# Altium PCB ch347-hs-usb-bridge.PcbDoc
Units mm, origin at the board's own origin, x right, y up, seen from the top; angles counter-clockwise.
Board outline 40 x 26 mm, 2 copper layers (Top Layer, Bottom Layer); 28 components, 29 nets, 116 pads, 130 vias.
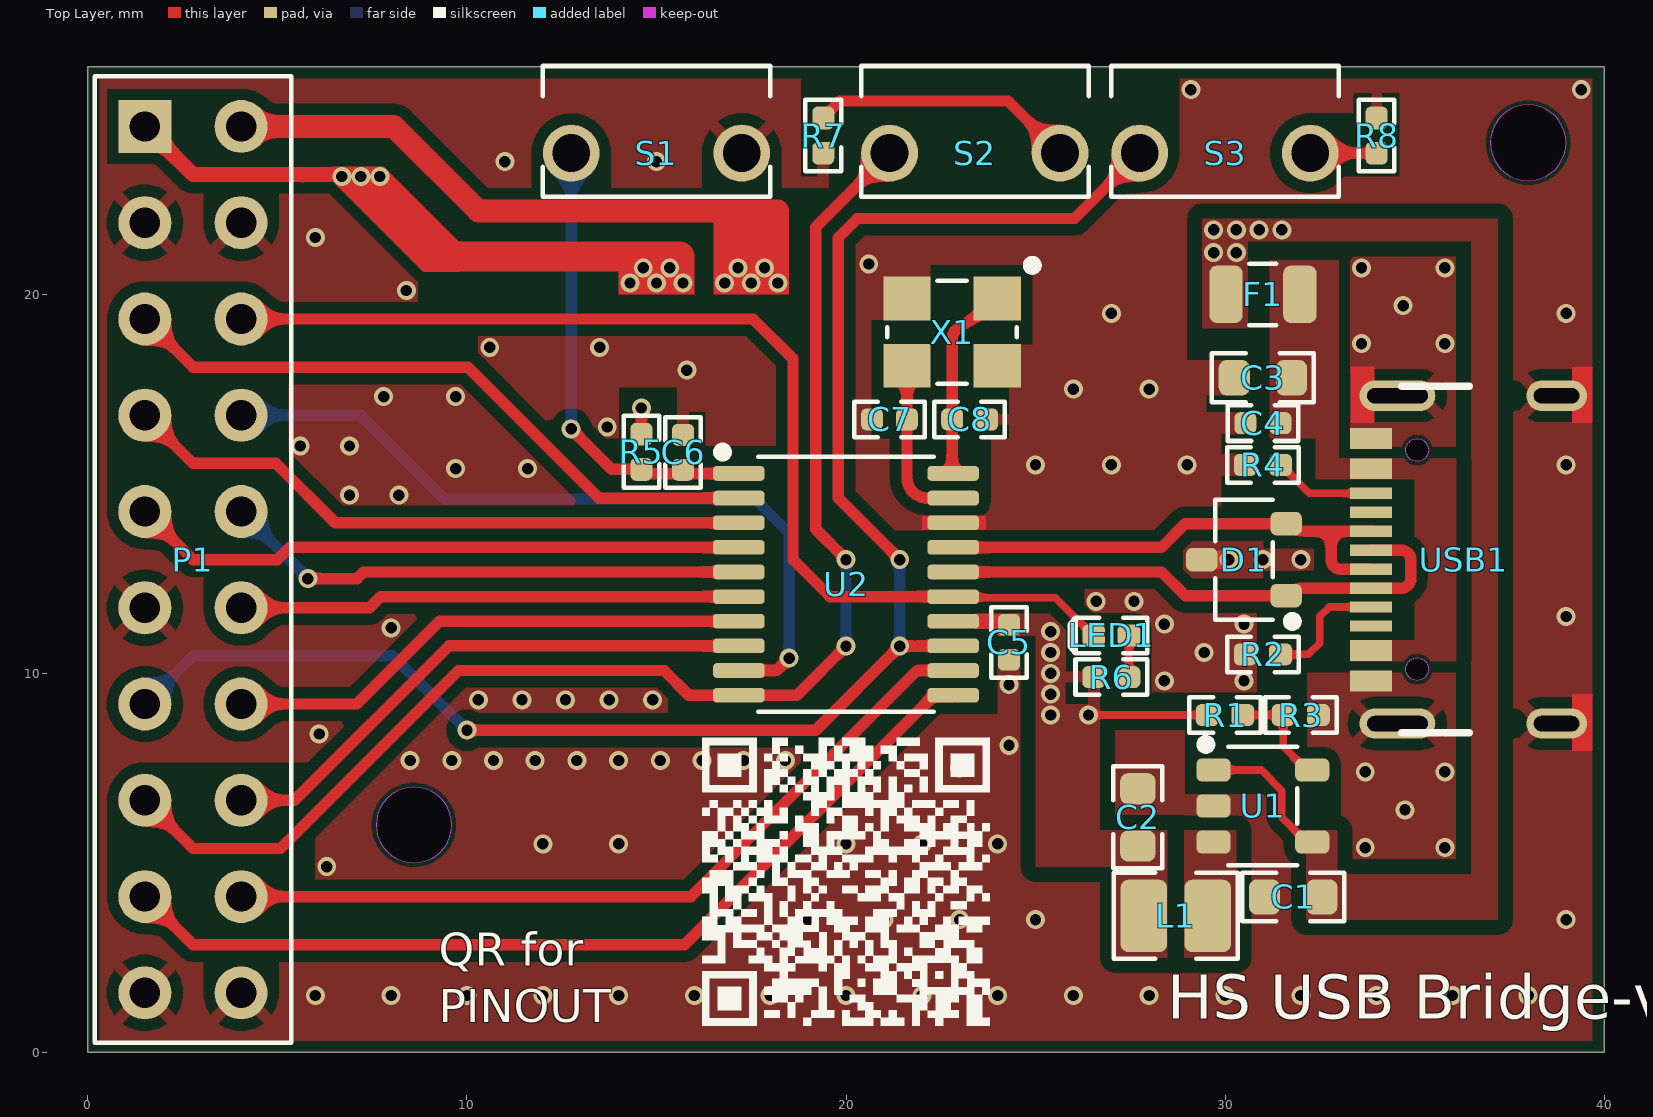
[diagram p0: Top Layer view]
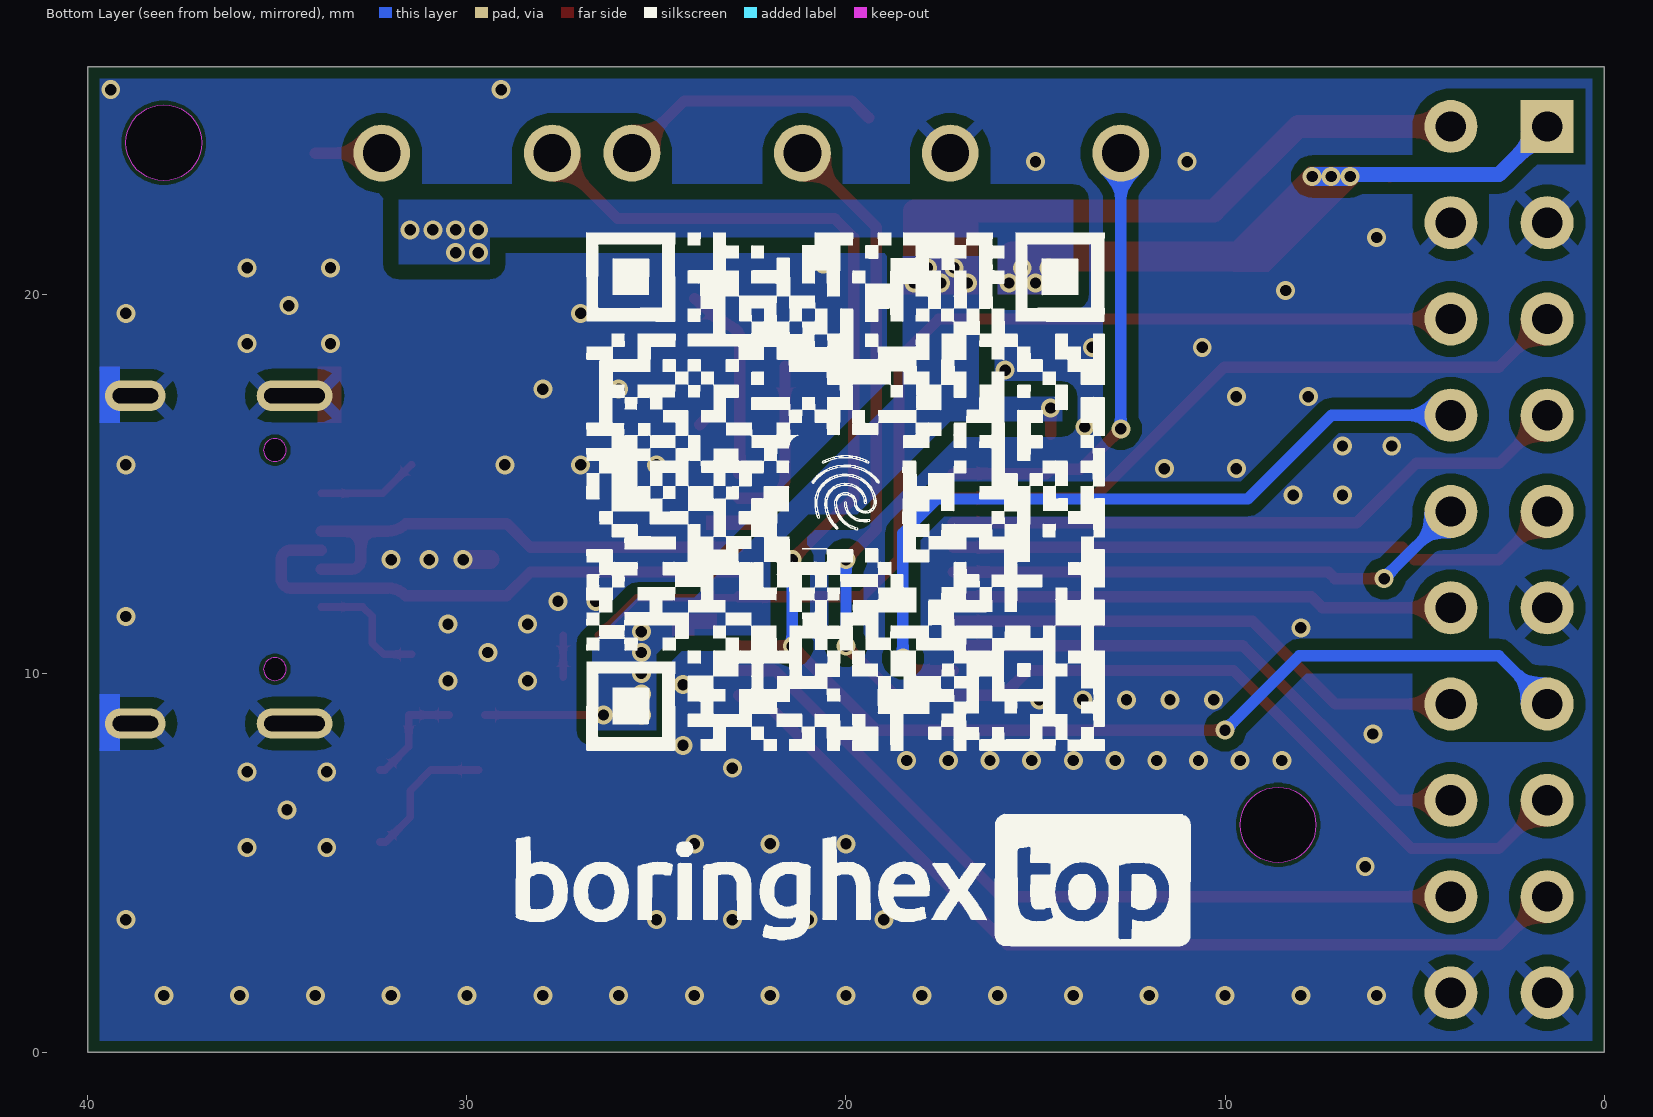
[diagram p1: Bottom Layer view, seen from below]
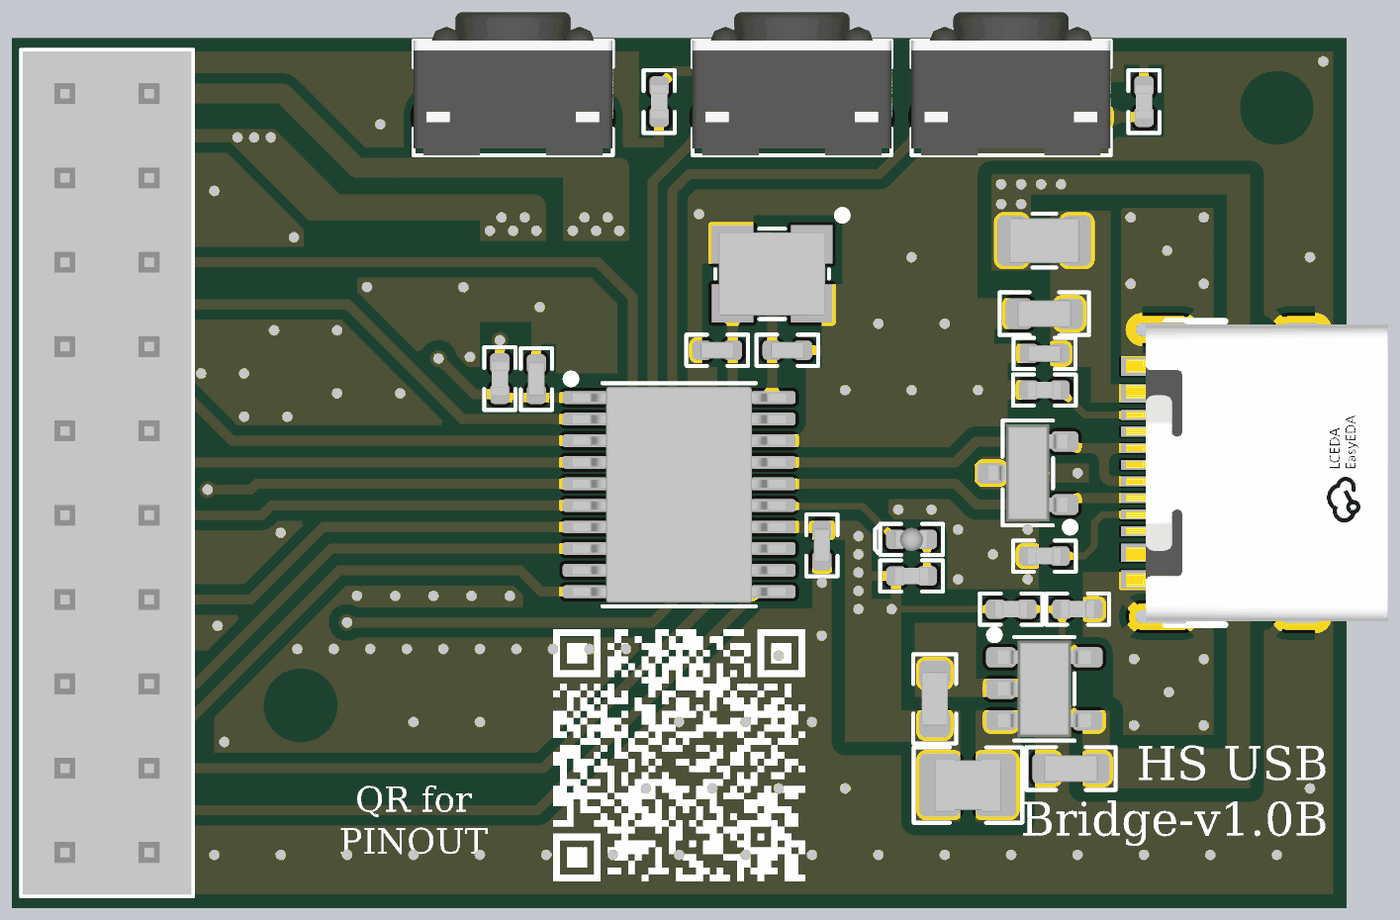
[diagram p2: 3D render of the assembled board from above, using the file's embedded part models]

## Layer stack, top to bottom
Top Solder: solder mask 0.0102, Solder Resist, Dk 3.5
Top Layer: signal copper 0.0356
Dielectric 1: dielectric 0.32, FR-4, Dk 4.8
Bottom Layer: signal copper 0.0356
Bottom Solder: solder mask 0.0102, Solder Resist, Dk 3.5

## Board outline
0,0 0,26 40,26 40,0
cut-out: 37,24 ccw(c38,24) 38,23 ccw(c38,24) 39,24 ccw(c38,24) 38,25 ccw(c38,24)
cut-out: 7.6,6 ccw(c8.6,6) 8.6,5 ccw(c8.6,6) 9.6,6 ccw(c8.6,6) 8.6,7 ccw(c8.6,6)

## Design rules (kind name [scope] priority, off if disabled: settings)
BoardOutlineClearance [All] p1: gap=0.3 ignorepadtopadclearanceinfootprint=FALSE except(0.1: Poly-CutoutEdge)
Clearance Clearance_2 [InNet('USB5V') vs InNet('NetR4_2') or InNet('GND') or InNet('B8') or InComponent('USB1')] p1: gap=0.3 ignorepadtopadclearanceinfootprint=TRUE except(0.1: Poly-Region; 0.225: SMDPad-Poly; 0.25: Track-Poly)
Clearance Clearance_1 [OnTopLayer or OnBottomLayer vs OnTopLayer or OnBottomLayer] p2: gap=0.3 ignorepadtopadclearanceinfootprint=TRUE except(0.4: Poly-Poly)
Clearance [All] p3: gap=0.3 ignorepadtopadclearanceinfootprint=TRUE except(0.1: Poly-Region; 0.5: Poly-Poly)
DiffPairsRouting [All] p1: maxlimit=0.3 minlimit=0.1 mostfreqgap=0.15 toplayer_minwidth=0.1 toplayer_maxwidth=0.3 toplayer_prefwidth=0.15 bottomlayer_minwidth=0.1 bottomlayer_maxwidth=0.3 bottomlayer_prefwidth=0.15 maxuncoupledlength=5
PolygonConnect PolygonConnect_1 [not InNet('GND')] p1: connectstyle=Direct reliefconductorwidth=0.254 reliefentries=4 polygonreliefangle="90 Angle" airgapwidth=0.254
PolygonConnect [All] p2: thpad.connectstyle=Relief thpad.reliefconductorwidth=0.3 thpad.reliefentries=4 thpad.polygonreliefangle="45 Angle" thpad.airgapwidth=0.3 smdpad.connectstyle=Direct smdpad.reliefconductorwidth=0.3 smdpad.reliefentries=4 smdpad.polygonreliefangle="90 Angle" smdpad.airgapwidth=0.3 via.connectstyle=Direct via.reliefconductorwidth=0.254 via.reliefentries=4 via.polygonreliefangle="90 Angle" via.airgapwidth=0.254
RoutingVias [All] p1: holewidth=0.3 width=0.5 viastyle="Through Hole" minholewidth=0.25 minwidth=0.4 maxholewidth=0.8 maxwidth=1
SolderMaskExpansion [All] p1: expansion=0.102 istentingtop=FALSE
Width [All] p1: maxlimit=1 minlimit=0.1 preferedwidth=0.3
29 further rules are at their usual default settings.

## Classes and differential pairs
differential pair UD: +UD_P -UD_N

## Components (designator, comment, footprint, x,y, rotation, side; value= is the part's Value field where it differs from the comment)
C1 "Capacitor" CAPC160X80X90L30N 31.8,4.1 r0 top value=10u
C2 "Capacitor" CAPC160X80X90L30N 27.7,6.2 r270 top value=10u
C3 "Capacitor" CAPC160X80X90L30N 31,17.8 r0 top value=10u
C4 "Capacitor" CAPC100X50X55L25N 31,16.6 r0 top value=100n
C5 "Capacitor" CAPC100X50X55L25N 24.3,10.818 r90 top value=100n
C6 "Capacitor" CAPC100X50X55L25N 15.7,15.83 r270 top value=100n
C7 "Capacitor" CAPC100X50X55L25N 21.148,16.7 r180 top value=10p
C8 "Capacitor" CAPC100X50X55L25N 23.262,16.7 r180 top value=10p
D1 "PESD3V3L2BT-ES" SOT23-3P95_237X111L52X43N 30.5,13 r90 top
F1 "SMD0805B050TF" FUSC210X135X125L37N 31,20 r180 top
L1 "Inductor" INDC200X160X105L60N 28.7,3.6 r180 top value=2u2
LED1 "蓝灯 正贴" LEDC100X50X45L25N 27,11 r0 top
P1 "Header 10X2" HDRV20W63P254_10X2_2540X508H860 1.5,24.43 r270 top
R1 "Resistor" RESC100X50X35L25N 30,8.9 r180 top value=100k
R2 "Resistor" RESC100X50X35L25N 31,10.5 r180 top value=4k7
R3 "Resistor" RESC100X50X35L25N 32,8.9 r180 top value=22k1
R4 "Resistor" RESC100X50X35L25N 31,15.5 r0 top value=4k7
R5 "Resistor" RESC100X50X35L25N 14.6,15.846 r270 top value=4k7
R6 "Resistor" RESC100X50X35L25N 27,9.9 r0 top value=470
R7 "Resistor" RESC100X50X35L25N 19.4,24.19 r270 top value=4k7
R8 "Resistor" RESC100X50X35L25N 34,24.19 r90 top value=4k7
S1 "KEY" RESRR450W70L600T345H610 15,23.725 r0 top
S2 "KEY" RESRR450W70L600T345H610 23.4,23.725 r0 top
S3 "KEY" RESRR450W70L600T345H610 30,23.725 r0 top
U1 "M3406-ADJ" SOT23-5P95_280X110L37X40N 31,6.5 r270 top
U2 "CH347" SOP20P65_650X640X120L60X24N 20,12.349 r270 top
USB1 "USB-TYPE-C-018" USB-TYPE-C-018 36.3,13 r90 top
X1 "TAXM8M4RDBCCT2T" OSCCC320X250X80L90X100N 22.8,19 r180 top

## Footprints (in the part's own frame and the unit in brackets; to place one, negate y for a bottom-side part, rotate by r counter-clockwise, add the part's x,y. Pads: shape width x height; smd on the part's side, far side on the other; paste and mask are expansions set on the pad)
CAPC100X50X55L25N [mm] "Capacitor, Chip; 1.00 mm L X 0.50 mm W X 0.55 mm H body"
  rrect50% 0.575x0.58 smd: 1(-0.462,0) 2(0.462,0)
  silkscreen extent -0.93,-0.47 0.93,0.47, body extent -0.5,-0.25 0.5,0.25, height 0.55
CAPC160X80X90L30N [mm] "Capacitor, Chip; 1.60 mm L X 0.80 mm W X 0.90 mm H body"
  rrect49% 0.82x0.929 smd: 1(-0.755,0) 2(0.755,0)
  silkscreen extent -1.35,-0.64 1.35,0.64, body extent -0.8,-0.4 0.8,0.4, height 0.9
FUSC210X135X125L37N [mm] "Fuse, Chip; 2.10 mm L X 1.35 mm W X 1.25 mm H body"
  rrect46% 0.879x1.52 smd: 1(-0.975,0) 2(0.975,0)
  silkscreen extent -0.36,-0.81 0.36,0.81, body extent -1.05,-0.67 1.05,0.67, height 1.25
HDRV20W63P254_10X2_2540X508H860 [mm] "Header, Vertical Non-Shrouded, 2.54 mm pitch; 0.68 mm lead width, 20 pin, 2 rows, 25.40 mm L X 5.08 mm W X 8.70 mm H body"
  rect 1.4x1.4 hole 0.8 paste-1.65: 1(0,0)
  round 1.4 hole 0.8 paste-1.65: 2(0,2.54) 3(2.54,0) 4(2.54,2.54) 5(5.08,0) 6(5.08,2.54) 7(7.62,0) 8(7.62,2.54) 9(10.16,0) 10(10.16,2.54) 11(12.7,0) 12(12.7,2.54) 13(15.24,0) 14(15.24,2.54) 15(17.78,0) 16(17.78,2.54) 17(20.32,0) 18(20.32,2.54) 19(22.86,0) 20(22.86,2.54)
  silkscreen extent -1.32,-1.32 24.18,3.86, body extent -1.27,-1.27 24.13,3.81, height 8.7
INDC200X160X105L60N [mm] "Inductor, Chip; 2.00 mm L X 1.60 mm W X 1.05 mm H body"
  rrect33% 1.226x1.91 smd: 1(-0.842,0) 2(0.842,0)
  silkscreen extent -1.64,-1.13 1.64,1.13, body extent -1,-0.8 1,0.8, height 1.05
LEDC100X50X45L25N [mm] "LED, Chip; 1.00 mm L X 0.50 mm W X 0.45 mm H body"
  rrect50% 0.6x0.58 smd: A(0.465,0) C(-0.465,0)
  silkscreen extent -1.1,-0.47 0.94,0.47, body extent -0.5,-0.35 0.5,0.35, height 0.8
OSCCC320X250X80L90X100N [mm] "Oscillator, Corner Concave; 3.20 mm L X 2.50 mm W X 0.80 mm H body"
  rect 1.249x1.149 smd: 1(-1.19,-0.89) 2(1.19,-0.89) 3(1.19,0.89) 4(-1.19,0.89)
  silkscreen extent -2.24,-1.89 1.71,1.36, body extent -1.6,-1.25 1.6,1.25, height 0.85
RESC100X50X35L25N [mm] "Resistor, Chip; 1.00 mm L X 0.50 mm W X 0.35 mm H body"
  rrect50% 0.6x0.58 smd: 1(-0.465,0) 2(0.465,0)
  silkscreen extent -0.94,-0.47 0.94,0.47, body extent -0.5,-0.25 0.5,0.25, height 0.35
RESRR450W70L600T345H610 [mm] "Resistor, Radial (Molded); 4.50 mm pitch X 0.70 mm W X 6.00 mm L X 3.45 mm T X 6.10 mm H body"
  round 1.5 hole 1 paste-1.5: 1(-2.25,0) 2(2.25,0)
  silkscreen extent -3,-1.15 3,2.3, body extent -3,-1.15 3.01,3.15, height 6.01
SOP20P65_650X640X120L60X24N [mm] "Small Outline Pkg (SOP), 0.65 mm pitch; 20 pin, 6.50 mm L X 4.40 mm W X 1.20 mm H body"
  rrect50% 0.387x1.359 smd: 1(-2.925,-2.828) 2(-2.275,-2.828) 3(-1.625,-2.828) 4(-0.975,-2.828) 5(-0.325,-2.828) 6(0.325,-2.828) 7(0.975,-2.828) 8(1.625,-2.828) 9(2.275,-2.828) 10(2.925,-2.828) 11(2.925,2.828) 12(2.275,2.828) 13(1.625,2.828) 14(0.975,2.828) 15(0.325,2.828) 16(-0.325,2.828) 17(-0.975,2.828) 18(-1.625,2.828) 19(-2.275,2.828) 20(-2.925,2.828)
  silkscreen extent -3.61,-3.38 3.36,2.31, body extent -3.25,-3.2 3.25,3.2, height 1.2
SOT23-3P95_237X111L52X43N [mm] "Small Outline Transistor, SOT-23 Type, 0.95 mm pitch; 3 pin, 2.92 mm L X 1.30 mm W X 1.11 mm H body"
  rrect50% 0.621x0.826 smd: 1(-0.95,-1.113) 2(0.95,-1.113) 3(0,1.113)
  silkscreen extent -1.75,-1.4 1.58,0.76, body extent -1.46,-1.18 1.46,1.18, height 1.11
SOT23-5P95_280X110L37X40N [mm] "Small Outline Transistor, SOT-23 Type, 0.95 mm pitch; 5 pin, 2.90 mm L X 1.60 mm W X 1.10 mm H body"
  rrect50% 0.609x0.905 smd: 1(-0.95,-1.303) 2(0,-1.303) 3(0.95,-1.303) 4(0.95,1.303) 5(-0.95,1.303)
  silkscreen extent -1.75,-1.63 1.56,0.91, body extent -1.45,-1.4 1.45,1.4, height 1.1
USB-TYPE-C-018 [mm]
  rect 0.3x1.1 smd mask+0.05: A1(-3.325,2.45) A4(-2.525,2.45) A5(-1.25,2.45) A6(-0.25,2.45) A7(0.25,2.45) A8(1.25,2.45) A9(2.525,2.45) A12(3.325,2.45) B1(3.075,2.45) B4(2.275,2.45) B5(1.75,2.45) B6(0.75,2.45) B7(-0.75,2.45) B8(-1.75,2.45) B9(-2.275,2.45) B12(-3.075,2.45)
  oval 0.8x1.6 hole 0.4 slot 1.2 at 90 deg: SH1(-4.325,-2.45) SH2(4.325,-2.45)
  oval 0.8x2 hole 0.4 slot 1.6 at 90 deg: SH3(4.325,1.75) SH4(-4.325,1.75)
  Keep-Out Layer board cut-out: 2.89,0.93 2.775,0.953 2.678,1.018 2.613,1.115 2.59,1.23 2.59,1.23 2.613,1.345 2.678,1.442 2.775,1.507 2.89,1.53 2.89,1.53 3.005,1.507 3.102,1.442 3.167,1.345 3.19,1.23 3.19,1.23 3.167,1.115 3.102,1.018 3.005,0.953 2.89,0.93
  Keep-Out Layer board cut-out: -2.89,0.93 -3.005,0.953 -3.102,1.018 -3.167,1.115 -3.19,1.23 -3.19,1.23 -3.167,1.345 -3.102,1.442 -3.005,1.507 -2.89,1.53 -2.89,1.53 -2.775,1.507 -2.678,1.442 -2.613,1.345 -2.59,1.23 -2.59,1.23 -2.613,1.115 -2.678,1.018 -2.775,0.953 -2.89,0.93
  silkscreen extent -4.57,-0.14 4.57,1.64, body extent -4.47,-5.05 4.47,2.85, height 3.25

## Part data
C1 C2 C3: library part GRM188R61E106KA73D, Case/Package=0603, Manufacturer=CCTC(三环), MPN=TCC0603X5R106K100CT, Mounting Type=SMD, 编号=C380314
C4 C5 C6: library part GRM188R61E106KA73D, Case/Package=0402, Manufacturer=CCTC(三环), MPN=TCC0402X5R104M250AT, Mounting Type=SMD, 编号=C359190
C7 C8: library part GRM188R61E106KA73D, Case/Package=0402, Manufacturer=YAGEO(国巨), MPN=CC0402JRNPO9BN100, Mounting Type=SMD, 编号=C106199
D1: library part SMC24, "2路双向ESD", Manufacturer=ElecSuper(静芯微), 编号=C5180242
F1: library part "Fuse 1", "Fuse", 编号=C269104
L1: library part WPN201610U2R2MTY01, Case/Package=201610, Manufacturer=DDY(德立), MPN=SFE201610-2R2M, Mounting Type=SMD, 编号=C5159659
LED1: library part LED-SMD, "贴片LED", 编号=C965795
P1: "Header, 10-Pin, Dual row", 编号=C5116480
R1: library part RC0402FR-07100KL, Case/Package=0402, Manufacturer=RALEC(旺诠), MPN=RTT021003FTH, Mounting Type=SMD, 编号=C102750
R2 R4 R5 R7 R8: library part RC0402FR-07100KL, Case/Package=0402, Manufacturer=RALEC(旺诠), MPN=RTT02472JTH, Mounting Type=SMD, 编号=C103059
R3: library part RC0402FR-0722K1L, Case/Package=0402, Manufacturer=RALEC(旺诠), MPN=RTT022212FTH, Mounting Type=SMD, 编号=C102896
R6: library part RC0402FR-07100KL, Case/Package=0402, Manufacturer=RALEC(旺诠), MPN=RTT02471JTH, Mounting Type=SMD, 编号=C103058
S1 S2 S3: library part SW-PB, "Switch", Revision="July-2002: Re-released for DXP Platform.", 编号=C2888565
U1: "Vin=2V~6V,800mA,DCDC", Manufacturer=西安航天民芯, Mounting Type=SMD, MPN=M3406-ADJ, 编号=C83224
X1: library part X32258MSB4SI, "8MHz ±10ppm 10pF", Manufacturer=TAE(雅晶鑫), 编号=C400090
U2: 编号=C5122332
USB1: 编号=C2927038

## Via types
v1: diameter 0.5, hole 0.3, Top Layer to Bottom Layer, tented both sides, 130 vias

## Nets (pads, with @x,y where several pads share a name; then routed paths per layer and width w, separated by ;. In a path a pad name is that pad's centre, name@x,y a point inside that pad or via, vN(x,y) a via of type N, cw(c..) or ccw(c..) an arc to the next point about the centre after c; other vN are vias at no path point)
3V3: C2.2 C5.2 L1.2 P1.2 R1.2 R5.1 R6.1 U2.14 | length 18.7
  Top Layer w0.2: v1@26.6,8.9 R1.2
  Top Layer w0.3: R5.1 v1(14.6,17)
  Top Layer w0.6: P1.2 8.07,24.43 10.3,22.2 18.2,22.2
  other v1: 25.4,8.9 26.4,8.9 25.4,9.45 25.4,10 25.4,10.55 25.4,11.1 16.8,20.3 17.5,20.3 18.2,20.3 17.15,20.7 17.85,20.7
5V: C1.2 F1.2 P1.1 U1.1 U1.4 | length 23.2
  Top Layer w0.2: U1.1 30.95,7.45 31.5,6.9 31.5,6.2 32.15,5.55 U1.4
  Top Layer w0.4: P1.1 2.77,23.16 v1@6.5,23.16 ; 5.65,23.16 5.654,23.156 ; v1@6.691,23.156 6.7,23.147 v1(6.7,23.11) v1(7.2,23.11) v1(7.7,23.11)
  Top Layer w0.8: 9.5,21 15.35,21 15.6,21
  Bottom Layer w0.4: P1.1 2.77,23.16 v1@7.7,23.16
  other v1: 14.3,20.3 15,20.3 15.7,20.3 14.65,20.7 15.35,20.7 29.7,21.1 30.3,21.1 29.7,21.7 30.3,21.7 30.9,21.7 31.5,21.7
CTS0: P1.12 U2.6 | length 13.3
  Top Layer w0.3: P1.12 7.43,11.73 7.724,12.024 U2.6
CTS1: P1.5 U2.2 | length 17.6
  Top Layer w0.3: P1.5 2.77,18.08 10.02,18.08 13.476,14.624 U2.2
DCD0: LED1.C P1.6 U2.15 | length 29.1
  Top Layer w0.2: U2.15 22.853,12 25.525,12 26.525,11 LED1.C
  Top Layer w0.3: P1.6 17.55,19.35 18.6,18.3 18.6,13 19.576,12.024 U2.15
DSR0: P1.10 U2.5 | length 13.9
  Top Layer w0.3: v1(5.8,12.5) 7.1,12.5 7.274,12.674 U2.5
  Bottom Layer w0.3: P1.10 v1@5.81,12.5
DTR0: P1.8 U2.9 | length 20.7
  Top Layer w0.3: U2.9 18.175,10.074 v1(18.5,10.4)
  Bottom Layer w0.3: P1.8@3.84,16.81 7.19,16.81 9.4,14.6 17.6,14.6 18.5,13.7 v1(18.5,10.4)
DTR1: P1.15 S2.1 U2.10 | length 35.9
  Top Layer w0.3: P1.15 2.77,5.38 5.08,5.38 9.774,10.074 15.2,10.074 15.85,9.424 18.707,9.424 v1(20,10.718) ; v1(20,13) 19.2,13.8 19.2,21.775 S2.1
  Bottom Layer w0.3: v1(20,10.718) v1(20,13)
GND: C1.1 C2.1 C3.1 C4.1 C5.1 C6.1 C7.2 C8.1 D1.3 P1.3 P1.4 P1.11 P1.19 P1.20 R2.2 R3.1 R4.1 R7.2 R8.2 S1.2 U1.2 U2.18 USB1.A1 USB1.A12 USB1.B1 USB1.B12 USB1.SH1 USB1.SH2 USB1.SH3 USB1.SH4 X1.2 X1.4 | length 0.9
  Top Layer w0.3: C8.1 C8.1@23.862,16.56
  Top Layer w0.5: D1.3 v1(30.1,13)
  other v1: 6,1.5 8,1.5 10,1.5 12,1.5 14,1.5 16,1.5 18,1.5 20,1.5 22,1.5 24,1.5 26,1.5 28,1.5 30,1.5 32,1.5 34,1.5 36,1.5 38,1.5 19,3.5 21,3.5 23,3.5 25,3.5 39,3.5 6.3,4.9 33.7,5.4 35.8,5.4 12,5.5 14,5.5 20,5.5 22,5.5 24,5.5 34.75,6.4 33.7,7.4 35.8,7.4 23,7.5 8.5,7.7 9.6,7.7 10.7,7.7 11.8,7.7 12.9,7.7 14,7.7 15.1,7.7 16.2,7.7 17.3,7.7 18.4,7.7 24.3,8.1 6.1,8.4 10.3,9.3 11.45,9.3 12.6,9.3 13.75,9.3 14.9,9.3 24.3,9.7 28.4,9.8 30.5,9.8 29.45,10.55 8,11.2 28.4,11.3 30.5,11.3 39,11.5 26.6,11.9 27.6,11.9 31,13 32,13 6.9,14.7 8.2,14.7 9.7,15.4 11.6,15.4 25,15.5 27,15.5 29,15.5 39,15.5 5.6,16 6.9,16 13.7,16.5 7.8,17.3 9.7,17.3 26,17.5 28,17.5 15.8,18 10.6,18.6 13.5,18.6 33.6,18.7 35.8,18.7 27,19.5 39,19.5 34.7,19.7 8.4,20.1 33.6,20.7 35.8,20.7 20.6,20.8 6,21.5 11,23.5 15,23.5 29.1,25.4 39.4,25.4
NetC6_2: C6.2 R5.2 S1.1 U2.1 | length 12.2
  Top Layer w0.3: v1(12.75,16.45) 13.819,15.381 R5.2 14.713,15.268 17.166,15.268 U2.1
  Bottom Layer w0.3: v1(12.75,16.45) S1.1
NetL1_1: L1.1 U1.3
NetLED1_A: LED1.A R6.2 | length 1.1
  Top Layer w0.2: R6.2 LED1.A
NetR1_1: R1.1 R3.2 U1.5 | length 2.9
  Top Layer w0.2: R1.1 R3.2 31.535,8.07 32.155,7.45 U1.5
NetR2_1: R2.1 USB1.A5 | length 3.3
  Top Layer w0.2: R2.1 32.2,10.5 32.5,10.8 32.5,11.5 32.75,11.75 USB1.A5
NetR4_2: R4.2 USB1.B5 | length 2.7
  Top Layer w0.2: R4.2 31.475,15.5 32.225,14.75 USB1.B5
NetR7_1: R7.1 S2.2 | length 7
  Top Layer w0.3: R7.1 19.845,25.1 24.275,25.1 S2.2
NetR8_1: R8.1 S3.2 | length 1.7
  Top Layer w0.3: S3.2 R8.1
OSC_IN: C7.1 U2.19 X1.3 | length 4.5
  Top Layer w0.3: X1.3 C7.1 21.61,15.163 ccw(c22.149,15.163) 22.149,14.624 U2.19
OSC_OUT: C8.2 U2.20 X1.1 | length 5.2
  Top Layer w0.3: U2.20 22.8,15.303 C8.2 22.8,18.837 cw(c23.1,18.837) 22.936,19.089 23.516,19.466 X1.1
RI0: P1.17 U2.11 | length 24.6
  Top Layer w0.3: P1.17 2.77,2.84 15.74,2.84 22.281,9.381 22.785,9.381 U2.11
RTS0: P1.14 U2.7 | length 14
  Top Layer w0.3: P1.14 7.09,9.19 9.274,11.374 U2.7
RTS1: P1.13 S3.1 U2.13 | length 43.9
  Top Layer w0.3: v1(10,8.5) 19.2,8.5 v1(21.418,10.718) 22.822,10.718 U2.13 ; v1(21.418,13) 19.8,14.618 19.8,21.5 20.3,22 26.025,22 S3.1
  Bottom Layer w0.3: P1.13 2.77,10.46 8.04,10.46 v1(10,8.5) ; v1(21.418,10.718) v1(21.418,13)
RXD0: P1.18 U2.12 | length 21.5
  Top Layer w0.3: P1.18@3.84,4.11 15.91,4.11 21.874,10.074 U2.12
RXD1: P1.9 U2.4 | length 16.3
  Top Layer w0.3: P1.9 2.77,13 5,13 5.324,13.324 U2.4
TXD0: P1.16 U2.8 | length 14.8
  Top Layer w0.3: P1.16 5.45,6.65 9.524,10.724 U2.8
TXD1: P1.7 U2.3 | length 16.8
  Top Layer w0.3: P1.7 2.77,15.54 4.96,15.54 6.526,13.974 U2.3
UD_N: D1.1 U2.16 USB1.A7 USB1.B7 | length 14.2
  Top Layer w0.3: U2.16 28.326,12.674 28.95,12.05 D1.1 cw(c32.096,11.567) 32.096,12.25 USB1.B7 34.65,12.25 ccw(c34.65,12.5) 34.9,12.5 34.9,13 ccw(c34.65,13) 34.65,13.25 USB1.A7
UD_P: D1.2 U2.17 USB1.A6 USB1.B6 | length 13.3
  Top Layer w0.3: U2.17 28.324,13.324 28.95,13.95 D1.2 ccw(c32.096,14.433) 32.096,13.75 32.8,13.75 ; USB1.A6 33.05,12.75 cw(c33.05,13) 32.8,13 32.8,13.75 ; USB1.B6 32.8,13.75
USB5V: C3.2 C4.2 F1.1 USB1.A4 USB1.A9 USB1.B4 USB1.B9
pads on no net: USB1.A8 USB1.B8

## Polygon pours and split planes (outlines as drawn)
GND on Top Layer "GND_L01_P009" (solid, remove dead copper, pour order 9): 0,0 0,26 40,26 40,0
NetL1_1 on Top Layer "NONET_L-01_P-001" (solid, remove dead copper, pour order 4): 30.3,5.854 30.3,2.5 28.929,2.5 28.929,5.854
3V3 on Top Layer "NONET_L-01_P-001" (solid, remove dead copper, pour order 3): 28.471,2.5 28.471,5.855 26.69,5.855 26.69,10.045 25.8,10.045 25.8,11.568 24.3,11.568 24.3,10.993 25,10.993 25,4.9 27.1,4.9 27.1,2.5
5V on Top Layer "NONET_L-01_P-001" (solid, remove dead copper, pour order 1): 30.6,19.1 30.6,21.4 36.5,21.4 36.5,4.7 32.965,4.7 32.965,5.854 32.145,5.854 32.145,3.5 37.2,3.5 37.2,22 29.4,22 29.4,19.1
USB5V on Top Layer "NONET_L-01_P-001" (solid, remove dead copper, pour order 0): 33.3,10.325 36.1,10.325 36.1,15.675 33,15.675 33,20.9 31.174,20.9 31.174,16.2 32.4,16.2 32.4,15.125 35,15.125 35,10.875 33.3,10.875
3V3 on Bottom Layer "3V3_L02_P005" (solid, remove dead copper, pour order 5): 22,13.2 21,14.2 19.7,14.2 17.25,16.65 14.3,16.65 14.3,17.3 16.5,17.3 16.5,21 18.5,21 18.5,17.5 24,12 25.5,12 26.7,10.8 26.7,8.5 25,8.5 25,10.5 24.5,11 22,11
GND on Bottom Layer "GND_L02_P007" (solid, remove dead copper, pour order 7): 0,0 0,26 40,26 40,0
5V on Bottom Layer "5V_L02_P006" (solid, remove dead copper, pour order 6): 31.8,20.8 31.8,21.4 31.8,22.5 14,22.5 14,20 16,20 16,21.5 29.4,21.5 29.4,20.8

## Other copper
Top Layer:
  region net GND: 39.694,9.45 39.15,9.45 39.15,7.95 39.694,7.95
  region net GND: 39.694,18.1 39.15,18.1 39.15,16.6 39.694,16.6
  rectangle net GND: 33.306,16.6 33.95,18.1
  rectangle net GND: 22,13.781 23.7,14.168
  rectangle net 5V: 14,20 16,21
  rectangle net 3V3: 16.5,20 18.5,22.2
  pour cut-out: 21.2,13.781 21.2,13.6 22.245,13.6 22.245,13.781
  pour cut-out: 32.341,12.709 32.341,13 32.6,13 32.6,12.3 28.7,12.3 28.7,13.7 32.341,13.7 32.341,13.291 31.011,13.291 31.011,13.491 28.9,13.491 28.9,12.509 31.011,12.509 31.011,12.709
  pour cut-out: 18.8,7.5 19,7.5 19,8.1 18.8,8.1
  pour cut-out: 15.3,8.9 15.5,8.9 15.5,9.5 15.3,9.5
  pour cut-out: 28.929,2.092 28.929,2.3 28.471,2.3 28.471,2.092
  pour cut-out: 15.846,16.005 15.846,16.9 16.3,16.9 16.3,16.005 18.2,16.005 18.2,15.756 13.6,15.756 13.6,16.2 14.001,16.2 14.001,17.55 15.554,17.55 15.554,16.005
  pour cut-out: 24.446,10.644 24.446,10.5 24.59,10.5 24.59,10.993 23.411,10.993 23.411,8.923 24.01,8.923 24.01,10.5 24.154,10.5 24.154,10.644
  pour cut-out: 28.471,6.263 28.471,6.1 28.929,6.1 28.929,6.262
  pour cut-out: 26.3,11.599 26.3,12.3 26,12.3 26,10.45 27.465,10.45 27.465,8.6 28.936,8.6 28.936,6.804 32.303,6.804 32.303,5.854 33.064,5.854 33.064,7.45 32.165,7.45 32.165,10.019 33.3,10.019 33.3,11.739 30.835,11.739 30.835,9.499 28.074,9.499 28.074,11 27.465,11 27.465,11.599
  pour cut-out: 30.538,15.21 29.9,15.21 29.9,14.409 31.011,14.409 31.011,19.1 28.992,19.1 28.992,18.264 30.245,18.264 30.245,17.336 29.5,17.336 29.5,16.89 30.538,16.89 30.538,16.31 29.9,16.31 29.9,15.79 30.538,15.79
  pour cut-out: 23.815,16.2 23.815,14.721 21.9,14.721 21.9,16.2 20.686,16.2 20.686,19.316 22.234,19.316 22.234,20.765 24.914,20.765 24.914,18.684 23.366,18.684 23.366,17.535 24.3,17.535 24.3,16.846 23.724,16.846 23.724,16.554 24.3,16.554 24.3,16.2
  pour cut-out: 28.8,23.725 28.8,26 27.3,26 27.3,23.725
  pour cut-out: 34.145,24.655 34.145,25.3 34.6,25.3 34.6,23.116 32.25,23.116 32.25,24.775 33.4,24.775 33.4,25.3 33.855,25.3 33.855,24.655
  pour cut-out: 19.255,23.725 19.545,23.725 19.545,22.7 19.845,22.7 19.845,25.8 18.8,25.8 18.8,23.1 19.255,23.1
  pour cut-out: 1.5,24.43 1.5,25.43 4.04,25.43 4.04,24.43 5.04,24.43 5.04,21.89 3.04,21.89 3.04,24.43
  pour cut-out: 18.3,22.806 19.6,22.806 19.6,22.5 16.2,22.5 16.2,23.6 18.3,23.6
  pour cut-out: 13.8,23.725 13.8,22.806 11.7,22.806 11.7,23.725
  pour cut-out: 8.7,20.4 9.8,20.4 9.8,19.7 8.7,19.7
  pour cut-out: 5.5,19 10.3,19 10.3,18.4 5.5,18.4
  pour cut-out: 6,4.11 5.04,4.11 5.04,1.57 3.04,1.57 3.04,4.11 0.5,4.11 0.5,6.65 1.5,6.65 1.5,7.65 6,7.65
  pour cut-out: 4.04,17.8 5.3,17.8 5.3,15.8 4.04,15.8 4.04,11.73 3.04,11.73 3.04,14.2 0.5,14.2 0.5,19.35 1.5,19.35 1.5,20.35 4.04,20.35
  region net 5V: 7.81,23.36 9.8,21.37 9.8,20.6 8.85,20.6 6.45,23 6.45,23.36
  pour cut-out: 26.38,9.755 26.38,9.2 25.8,9.2 25.8,9.755
  region net 3V3: 23.411,11.568 24.59,11.568 24.59,10.993 24.01,10.993 24.01,11.181 23.411,11.181
Bottom Layer:
  region net GND: 39.694,18.1 39.15,18.1 39.15,16.6 39.694,16.6
  region net GND: 39.694,9.45 39.15,9.45 39.15,7.95 39.694,7.95
  rectangle net 5V: 6.7,22.86 7.7,23.36
  pour cut-out: 18.3,23.6 18.3,22.806 16.2,22.806 16.2,23.6
  pour cut-out: 32.25,23.725 31.2,23.725 31.2,22.675 32.25,22.675
  pour cut-out: 25.65,23.725 25.65,24.775 27.75,24.775 27.75,23.725 28.8,23.725 28.8,22.806 24.6,22.806 24.6,23.725
  pour cut-out: 22.2,23.725 22.2,22.806 20.1,22.806 20.1,23.725
  pour cut-out: 5.04,11.73 5.04,9.19 4.04,9.19 4.04,8.19 1.5,8.19 1.5,9.19 3.04,9.19 3.04,11.73
  pour cut-out: 2.5,25.43 4.04,25.43 4.04,24.43 5.04,24.43 5.04,21.89 3.04,21.89 3.04,24.4 2.5,24.4

## Silkscreen, mask and mechanical layers (free items; w line width, h text height)
Top Overlay:
  drawing of 89 lines, arcs and shapes, not listed
  text "QR for / PINOUT" at 9.253,0.5 h1.5
  text "HS USB Bridge-v1.0B" at 28.482,0.5 h2
Bottom Overlay:
  drawing of 40 lines, arcs and shapes, not listed
Board Shape:
  circle w0.2: c38,24 r1
  circle w0.2: c8.6,6 r1
  lines w0.2: 0,0 40,0 40,26 0,26 0,0
Bottom Courtyard:
  lines w0.08: 10.4,3.6 ccw(c11.2,3.6) 11.2,2.8 28.8,2.8 ccw(c28.8,3.6) 29.6,3.6 29.6,22.4 ccw(c28.8,22.4) 28.8,23.2 11.2,23.2 ccw(c11.2,22.4) 10.4,22.4 10.4,3.6